# Altium PCB GRIPPER2009.PcbDoc (part 4 of 4)
Units mm, origin at the board's own origin, x right, y up, seen from the top; angles counter-clockwise.
Board outline 100.25 x 80.25 mm, 4 copper layers (Top Layer, Mid-Layer 1, Mid-Layer 2, Bottom Layer); 370 components, 241 nets, 1110 pads, 418 vias.
Unrouted connection lines stored in the file: 10.
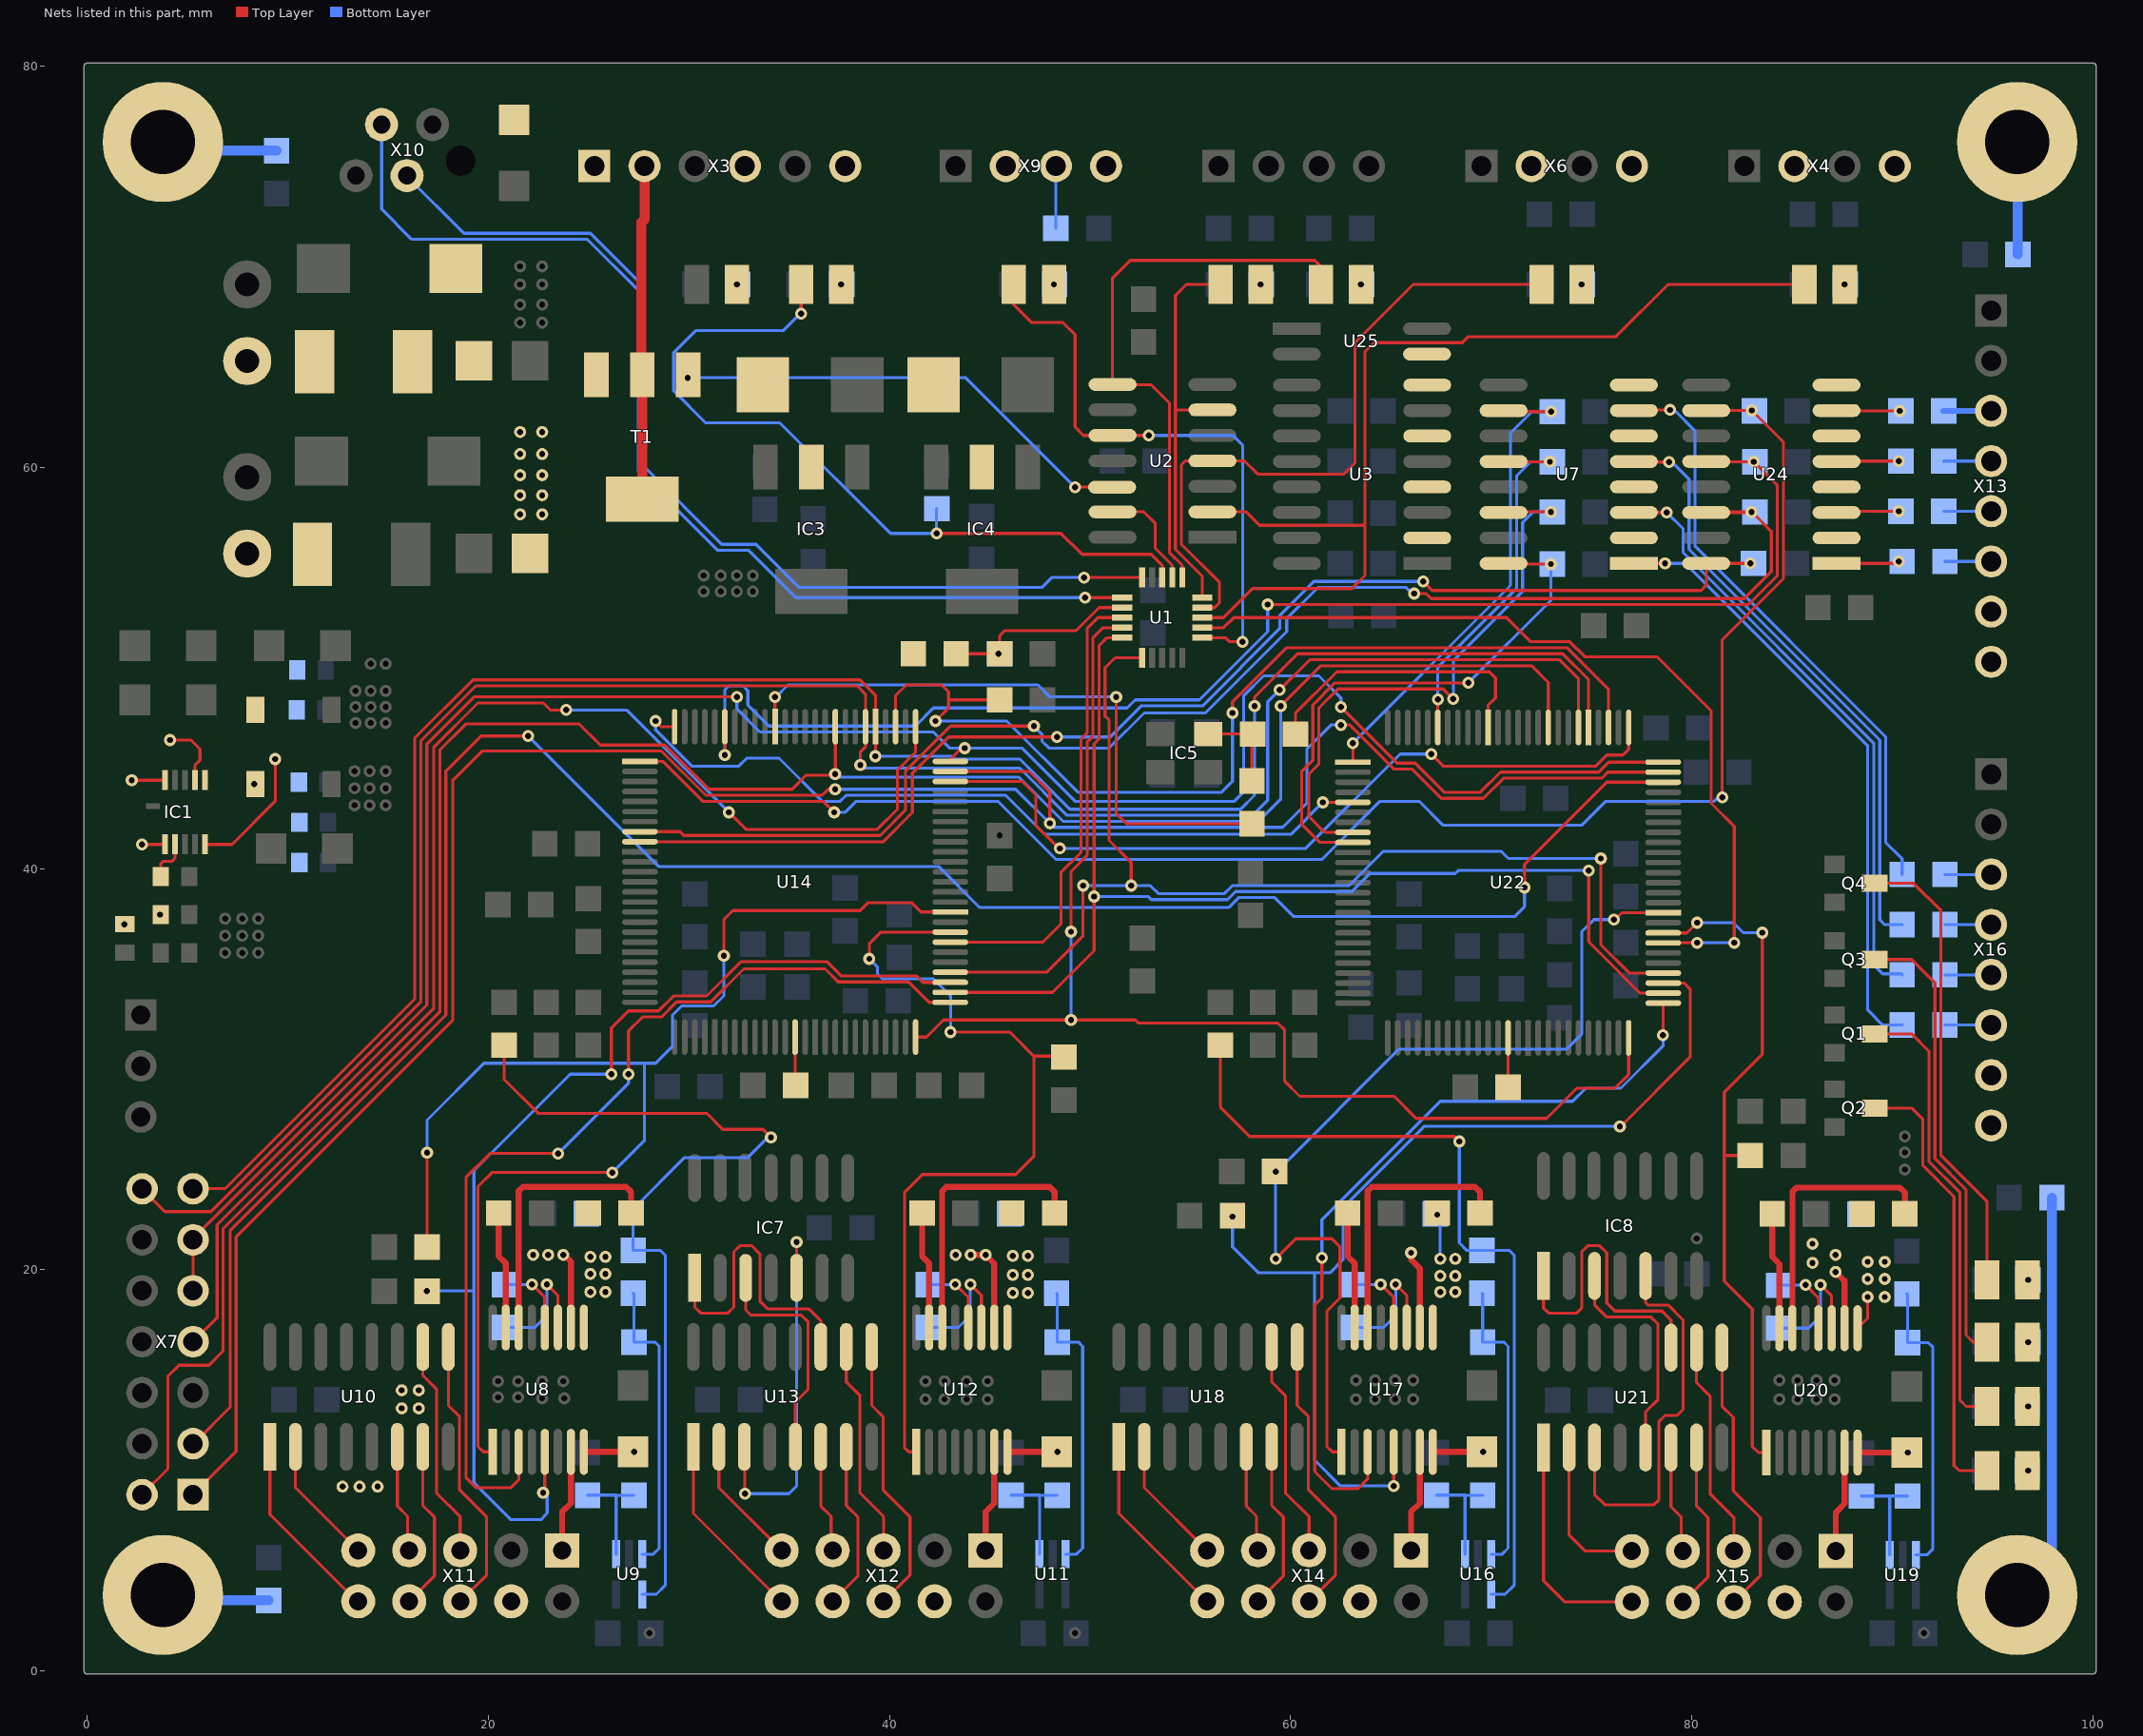
[diagram p6: the nets of this part, all layers, seen from the top]

## Via types
v1: diameter 0.6, hole 0.3, Top Layer to Bottom Layer, 418 vias

## Nets (pads, with @x,y where several pads share a name; then routed paths per layer and width w, separated by ;. In a path a pad name is that pad's centre, name@x,y a point inside that pad or via, vN(x,y) a via of type N, cw(c..) or ccw(c..) an arc to the next point about the centre after c; other vN are vias at no path point) (continued)
N15757211: D3.1 R12.1 U1.13 | length 40.3
  Top Layer w0.15: v1(35.6,67.65) D3.1@35.6,69.1 ; v1(42.35,56.7) 48.55,56.7 49.6,55.65 53.05,55.65 53.599,55.101 U1.13@53.599,54.496
  Bottom Layer w0.15: v1(35.6,67.65) 35.55,67.65 34.7,66.8 30.35,66.8 29.25,65.7 29.25,63.8 30.85,62.2 34.55,62.2 40.05,56.7 v1(42.35,56.7) 42.35,57.916 R12.1@42.367,57.933
N15772152: U1.18 U14.57 | length 23.1
  Top Layer w0.15: U14.57@43.036,36.33 47.65,36.33 48.55,37.229 48.55,39.8 49.55,40.8 49.55,46.45 49.85,46.75 49.85,51.95 50.398,52.498 U1.18@51.601,52.498
N15795123: U14.84 U22.84 X7.2 | length 115.8
  Top Layer w0.15: X7.2@2.76,8.8 4.05,10.09 4.05,14.7 4.6,15.25 6.1,15.25 6.8,15.95 6.8,22.05 17.6,32.85 17.6,45.9 18.9,47.2 24.55,47.2 25.6,46.15 28.8,46.15 31,43.95 35.15,43.95 35.85,44.65 37.306,44.65 U14.84@37.306,47.063 37.3,47.057 v1(37.3,44.7) ; v1(59.5,48.1) 61.5,50.1 72,50.1 72.833,49.267 U22.84@72.833,47.027
  Bottom Layer w0.15: v1(37.3,44.7) 37.4,44.7 37.55,44.55 46.45,44.55 48.65,42.35 58.4,42.35 59.5,43.45 v1(59.5,48.1)
N15795127: U14.75 U22.75 X7.9 X7.11 | length 106.9
  Top Layer w0.15: X7.9@5.3,18.96 X7.11@5.3,21.5 5.3,21.55 16.95,33.2 16.95,46.2 19.3,48.55 v1(32.4,48.55) ; U14.75@43.036,45.336 43,45.373 43,45.4 43.6,46 v1(43.75,46) ; v1(62.5,48.05) 65.3,45.25 66.2,45.25 67.65,43.8 69.45,43.8 70.45,44.8 75.35,44.8 75.85,45.3 U22.75@78.563,45.3
  Bottom Layer w0.15: v1(32.4,48.55) 32.4,47.95 33.55,46.8 42.2,46.8 43,46 v1(43.75,46) 46.6,46 49.25,43.35 57.2,43.35 57.65,43.8 57.65,48.6 58.65,49.6 61.4,49.6 62.5,48.5 v1(62.5,48.05)
N15795225: U14.74 U22.74 X7.1 ~FV25.FV | length 116.4
  Top Layer w0.15: X7.1@5.3,8.8 7.45,10.95 7.45,21.65 18.25,32.45 18.25,44.4 19.7,45.85 28.65,45.85 30.85,43.65 36.65,43.65 36.95,43.95 v1(37.3,43.95) ; U14.74@43.036,44.836 46.964,44.836 48,43.8 ~FV25.FV@48,42.25 ; v1(62.5,47.15) 62.95,47.15 65.15,44.95 66.05,44.95 67.5,43.5 69.6,43.5 70.6,44.5 75.5,44.5 75.799,44.799 U22.74@78.563,44.799
  Bottom Layer w0.15: v1(37.3,43.95) 46.3,43.95 ~FV25.FV@48,42.25 48.2,42.05 59.6,42.05 60.8,43.25 60.8,45.95 62,47.15 v1(62.5,47.15)
N15795229: U22.73 X7.3 | length 108.3
  Top Layer w0.15: X7.3@5.3,11.34 5.34,11.34 7.15,13.15 7.15,21.95 17.9,32.7 17.9,44.85 19.65,46.6 v1(22,46.6) ; v1(71.65,39.05) 71.65,40.2 75.75,44.3 76.848,44.3 ; U22.73@78.563,44.299 76.849,44.299 ; 76.848,44.3 76.849,44.299
  Bottom Layer w0.15: v1(22,46.6) 28.5,40.1 42.45,40.1 44.5,38.05 56.9,38.05 57.4,38.55 59.2,38.55 60.15,37.6 71.15,37.6 71.65,38.1 v1(71.65,39.05)
N15867067: R19.2 U14.90 | length 31.8
  Top Layer w0.15: v1(34.3,48.55) 34.3,47.067 U14.90@34.304,47.063 ; v1(51.3,48.55) 51.3,42.75 51.817,42.233 R19.2@58.067,42.233
  Bottom Layer w0.15: v1(34.3,48.55) 34.35,48.55 34.95,49.15 47.4,49.15 48,48.55 v1(51.3,48.55)
N15867073: R17.2 U22.90 | length 14.6
  Top Layer w0.15: R17.2@60.234,46.7 60.234,47.734 62.3,49.8 69.9,49.8 70.2,49.5 70.2,48.5 69.831,48.131 U22.90@69.831,47.027
N15869117: IC5.3 R17.1 R19.1 | length 4.5
  Top Layer w0.15: IC5.3@55.9,46.7 R17.1@58.1,46.7 58.067,46.667 R19.1@58.067,44.367
N15872763: U1.1 U14.54 U22.54 | length 65.5
  Top Layer w0.15: v1(49.65,39.15) 49.65,36.65 47.828,34.828 ; v1(52.05,39.15) 52.05,40.3 50.95,41.4 50.95,47.4 50.75,47.6 50.75,50 51.25,50.5 U1.1@52.6,50.5 ; v1(75.45,40.5) 75.45,36.2 76.858,34.792 U22.54@78.563,34.792 ; 47.828,34.828 U14.54@43.036,34.828 47.828,34.828
  Bottom Layer w0.15: v1(52.05,39.15) v1(49.65,39.15) 53,39.15 53.4,38.75 56.7,38.75 57.1,39.15 62.9,39.15 64.6,40.85 70.5,40.85 70.85,40.5 v1(75.45,40.5)
N15873803: U1.20 U14.52 U22.52 | length 61
  Top Layer w0.15: U14.52@43.036,33.828 48.128,33.828 50.2,35.9 ; v1(50.2,38.6) 50.2,35.9 ; U1.20@51.601,51.499 50.849,51.499 50.45,51.1 50.45,46.45 50.2,46.2 50.2,35.9 ; v1(74.85,39.9) 74.85,36.35 77.409,33.791 U22.52@78.563,33.791
  Bottom Layer w0.15: v1(50.2,38.6) 52.9,38.6 53.05,38.45 56.85,38.45 57.25,38.85 63.05,38.85 63.95,39.75 68.2,39.75 68.35,39.9 v1(74.85,39.9)
N15874402: U1.19 U14.50 U22.50 | length 69.6
  Top Layer w0.15: U14.50@41.309,31.6 41.85,31.6 42.7,32.45 ; v1(49.05,32.45) 42.7,32.45 ; v1(49.05,36.85) 49.05,39.85 49.85,40.65 49.85,46.3 50.15,46.6 50.15,51.5 50.649,51.999 U1.19@51.601,51.999 ; U22.50@76.836,31.563 76.836,29.736 76.15,29.05 74.25,29.05 72.75,27.55 66.25,27.55 65.15,28.65 60.45,28.65 59.7,29.4 59.7,31.95 59.35,32.3 52.4,32.3 52.25,32.45 42.7,32.45
  Bottom Layer w0.15: v1(49.05,32.45) v1(49.05,36.85)
N15875912: U1.7 U22.57 | length 43
  Top Layer w0.15: U1.7@55.597,51.999 56.649,51.999 57.175,52.5 70.75,52.5 71.95,51.3 73.9,51.3 74.65,50.55 78.249,50.55 80.95,47.85 80.95,43.25 82.1,42.1 v1(82.1,36.3) ; U22.57@78.563,36.293 78.571,36.3 v1(80.25,36.3)
  Bottom Layer w0.15: v1(80.25,36.3) v1(82.1,36.3)
N15878002: R16.1 U14.78 U22.78 | length 54.4
  Top Layer w0.15: U14.78@40.308,47.063 40.308,48.608 40.85,49.15 42.6,49.15 42.95,48.8 42.95,48.4 ; v1(42.3,47.35) 42.95,48 42.95,48.4 ; v1(57.1,47.75) 57.1,48.3 59.8,51 73.75,51 75.835,48.914 U22.78@75.835,47.027 ; 42.95,48.4 R16.1@45.5,48.4 42.95,48.4
  Bottom Layer w0.15: v1(42.3,47.35) 45.85,47.35 49.4,43.8 56.55,43.8 57.1,44.35 v1(57.1,47.75)
N15878863: U14.81 U22.81 X7.14 | length 104.5
  Top Layer w0.15: X7.14@2.76,24.04 3.9,22.9 6.2,22.9 16.65,33.35 16.65,46.35 19.4,49.1 38.4,49.1 38.807,48.693 U14.81@38.807,47.063 38.807,46.057 38.55,45.8 v1(38.55,45.15) ; v1(59.45,48.9) 60.95,50.4 73.4,50.4 74.334,49.466 U22.81@74.334,47.027
  Bottom Layer w0.15: v1(38.55,45.15) 38.7,45 46.5,45 48.85,42.65 58.1,42.65 58.85,43.4 58.85,48.3 v1(59.45,48.9)
N15879489: U14.80 U22.80 X7.13 | length 101.2
  Top Layer w0.15: X7.13@5.3,24.04 5.3,24.1 5.35,24.05 6.9,24.05 16.35,33.5 16.35,46.5 19.25,49.4 38.55,49.4 39.308,48.642 U14.80@39.308,47.063 v1(39.308,45.592) ; v1(58.2,48.1) 58.2,48.55 60.35,50.7 73.55,50.7 74.835,49.415 U22.80@74.835,47.027
  Bottom Layer w0.15: v1(39.308,45.592) 43.108,45.592 43.25,45.45 46.5,45.45 49,42.95 57.5,42.95 58.2,43.65 v1(58.2,48.1)
N15882073: U14.73 U22.76 | length 39.7
  Top Layer w0.15: U14.73@43.036,44.336 46.614,44.336 47.3,43.65 47.3,42.15 48.45,41 v1(48.5,41) ; v1(67,45.7) 67.6,45.1 75.2,45.1 75.75,45.65 76.55,45.65 76.836,45.936 U22.76@76.836,47.027
  Bottom Layer w0.15: v1(48.5,41) 60.75,41 65.45,45.7 v1(67,45.7)
N15882739: U14.76 X7.7 | length 66.1
  Top Layer w0.15: X7.7@5.3,16.42 6.5,17.62 6.5,22.25 17.3,33.05 17.3,46.05 19.5,48.25 22.75,48.25 23.1,47.9 v1(23.9,47.9) ; v1(32,42.8) 32.85,41.95 39.4,41.95 40.4,42.95 40.4,44.9 41.309,45.809 U14.76@41.309,47.063
  Bottom Layer w0.15: v1(23.9,47.9) 26.9,47.9 v1(32,42.8)
N15932011: IC1.5 R2.1 R3.1 | length 6.5
  Top Layer w0.15: IC1.5@5.9,41.2 7.25,41.2 9.4,43.35 v1(9.4,45.45)
N15932045: IC1.10 L5.1 | length 1.7
  Top Layer w0.15: v1(2.25,44.4) IC1.10@3.9,44.4 ; v1(8.35,44.2) L5.1@8.4,44.2
N15932053: C10.2 IC1.1 R6.1 R7.2 | length 1.2
  Top Layer w0.15: v1(2.75,41.2) IC1.1@3.9,41.2
N15932099: IC1.6 L3.1
N15932257: C9.1 IC1.7 R1.1 | length 3.5
  Top Layer w0.15: v1(1.878,37.222) C9.1@1.9,37.222 ; v1(4.15,46.4) 5.2,46.4 5.65,45.95 5.65,45.4 5.4,45.15 IC1.7@5.4,44.4 ; v1(3.65,37.7) R1.1@3.7,37.7 v1(3.65,37.7)
N15932803: IC1.2 R5.1 | length 2.2
  Top Layer w0.15: R5.1@3.7,39.6 3.7,40.25 3.8,40.35 4.25,40.35 4.4,40.5 IC1.2@4.4,41.2
N15972825: R28.2 X9.3 | length 3.1
  Bottom Layer w0.15: R28.2@48.3,71.9 X9.3@48.3,75
N15973694: R76.1 X16.3 | length 2.3
  Bottom Layer w0.15: R76.1@92.6,39.7 X16.3@94.9,39.7
N15973694_3838: R50.1 X13.3 | length 2.4
  Bottom Layer w0.3: R50.1@92.534,62.8 X13.3@94.9,62.8
N15974140: R71.1 X16.4 | length 2.3
  Bottom Layer w0.15: R71.1@92.6,37.2 X16.4@94.9,37.2
N15974140_3840: R52.1 X13.4 | length 2.4
  Bottom Layer w0.15: R52.1@92.534,60.3 X13.4@94.9,60.3
N15974588: R67.1 X16.5 | length 2.3
  Bottom Layer w0.15: R67.1@92.6,34.7 X16.5@94.9,34.7
N15974588_3842: R53.1 X13.5 | length 2.4
  Bottom Layer w0.15: R53.1@92.534,57.8 X13.5@94.9,57.8
N15975038: R72.1 X16.6 | length 2.3
  Bottom Layer w0.15: R72.1@92.6,32.2 X16.6@94.9,32.2
N15975038_3844: R54.1 X13.6 | length 2.3
  Bottom Layer w0.15: R54.1@92.6,55.3 X13.6@94.9,55.3
N15975490: R76.2 U7.7 | length 29.9
  Top Layer w0.15: U7.7@77.1,62.82 77.13,62.85 v1(78.9,62.85)
  Bottom Layer w0.15: v1(78.9,62.85) 79.1,62.85 80.15,61.8 80.15,56.05 89.65,46.55 89.65,41.3 90.466,40.484 R76.2@90.466,39.7
N15975490_3846: R50.2 U24.7 | length 3.2
  Top Layer w0.15: U24.7@87.2,62.82 87.22,62.8 v1(90.35,62.8)
  Bottom Layer w0.15: v1(90.35,62.8) R50.2@90.4,62.8
N15975944: R71.2 U7.5 | length 30.2
  Top Layer w0.15: U7.5@77.1,60.28 77.13,60.25 v1(78.85,60.25)
  Bottom Layer w0.15: v1(78.85,60.25) 79,60.25 79.85,59.4 79.85,55.9 89.35,46.4 89.35,37.45 89.6,37.2 R71.2@90.466,37.2
N15975944_3848: R52.2 U24.5 | length 3.2
  Top Layer w0.15: U24.5@87.2,60.28 87.22,60.3 v1(90.3,60.3)
  Bottom Layer w0.15: v1(90.3,60.3) R52.2@90.4,60.3
N15976400: R67.2 U7.3 | length 30.1
  Top Layer w0.15: U7.3@77.1,57.74 v1(78.74,57.74)
  Bottom Layer w0.15: v1(78.74,57.74) 79.55,56.93 79.55,55.75 89.05,46.25 89.05,35.2 89.5,34.75 90.416,34.75 R67.2@90.466,34.7
N15976400_3850: R53.2 U24.3 | length 3.2
  Top Layer w0.15: U24.3@87.2,57.74 87.26,57.8 v1(90.3,57.8)
  Bottom Layer w0.15: v1(90.3,57.8) R53.2@90.4,57.8
N15976858: R72.2 U7.1 | length 30.6
  Top Layer w0.15: U7.1@77.1,55.2 v1(78.65,55.2)
  Bottom Layer w0.15: v1(78.65,55.2) 79.65,55.2 88.75,46.1 88.75,32.95 89.5,32.2 R72.2@90.466,32.2
N15976858_3852: R54.2 U24.1 | length 3.3
  Top Layer w0.15: U24.1@87.2,55.2 90.25,55.2 90.3,55.25 v1(90.3,55.3)
  Bottom Layer w0.15: v1(90.3,55.3) R54.2@90.466,55.3
N15982543: D8.1 U1.6 U2.10 | length 29.9
  Top Layer w0.15: D8.1@46.2,69.1 46.2,68.1 47.1,67.2 48.65,67.2 49.25,66.6 49.25,62 49.67,61.58 U2.10@51.122,61.58 v1(52.93,61.58) ; U1.6@55.597,51.499 55.598,51.5 56.75,51.5 56.95,51.3 v1(57.6,51.3)
  Bottom Layer w0.15: v1(52.93,61.58) 57.12,61.58 57.6,61.1 v1(57.6,51.3)
N15982913: D7.1 U1.11 U2.8 | length 29.2
  Top Layer w0.15: U1.11@54.598,54.496 54.598,55.102 53.95,55.75 53.95,63.2 53.05,64.1 51.142,64.1 U2.8@51.122,64.12 51.122,69.422 52,70.3 61.2,70.3 61.5,70 D7.1@61.5,69.1
N15983284: D6.1 U1.10 U2.6 | length 21.8
  Top Layer w0.15: U1.10@55.597,53.497 55.597,54.553 54.25,55.9 54.25,62.85 ; D6.1@56.5,69.1 54.8,69.1 54.25,68.55 54.25,62.85 ; 54.25,62.85 U2.6@56.1,62.85 54.25,62.85
N15983658: D5.1 U1.9 U2.4 | length 34.3
  Top Layer w0.15: U1.9@55.597,52.998 56.198,52.998 56.45,53.25 56.45,54.25 54.55,56.15 54.55,60.1 54.76,60.31 U2.4@56.1,60.31 57.69,60.31 58.35,59.65 62.65,59.65 63.2,60.2 63.2,66.2 66.1,69.1 D5.1@72.5,69.1
N15983893: R74.2 U7.10 U22.1 | length 24.6
  Top Layer w0.15: U22.1@63.1,45.3 v1(63.1,46.25) ; U7.10@70.606,62.82 70.659,62.767 v1(72.983,62.767)
  Bottom Layer w0.15: v1(63.1,46.25) 70.95,54.1 70.95,61.7 72.017,62.767 R74.2@73.033,62.767 v1(72.983,62.767)
N15983893_3880: R46.2 U14.1 U24.10 | length 82.3
  Top Layer w0.15: U14.1@27.573,45.336 28.714,45.336 30.7,43.35 36.7,43.35 v1(37.25,42.8) ; U24.10@80.706,62.82 v1(82.98,62.82) 84.55,61.25 84.55,54.45 81.5,51.4 v1(81.5,43.55)
  Bottom Layer w0.15: v1(37.25,42.8) 37.8,42.8 38.35,43.35 45.4,43.35 48.3,40.45 61.55,40.45 64.45,43.35 66.4,43.35 67.6,42.15 74.5,42.15 75.7,43.35 81.1,43.35 81.3,43.55 v1(81.5,43.55) ; v1(82.98,62.82) 83,62.8 R46.2@83.1,62.8
N15984374: R69.2 U7.12 U22.95 | length 18.7
  Top Layer w0.15: U22.95@67.329,47.027 v1(67.329,48.421) ; U7.12@70.606,60.28 70.619,60.267 v1(72.917,60.267)
  Bottom Layer w0.15: v1(67.329,48.421) 67.329,50.029 71.25,53.95 71.25,59.55 71.967,60.267 R69.2@73.033,60.267 v1(72.917,60.267)
N15984374_3882: R47.2 U14.95 U24.12 | length 70.9
  Top Layer w0.15: v1(31.802,45.65) U14.95@31.802,47.063 ; v1(58.85,53.15) 82.8,53.15 84.25,54.6 84.25,59.084 v1(83.067,60.267) U24.12@80.719,60.267 ; U24.12@80.719,60.267 U24.12@80.706,60.28 U24.12@80.719,60.267
  Bottom Layer w0.15: v1(31.802,45.65) 31.802,48.902 32,49.1 32.7,49.1 32.95,48.85 32.95,48.15 34,47.1 41.3,47.1 42.2,48 51.85,48 52.25,48.4 55.45,48.4 58.85,51.8 v1(58.85,53.15) ; v1(83.067,60.267) R47.2@83.133,60.267
N15984858: R79.2 U7.14 U22.8 | length 29.8
  Top Layer w0.15: U22.8@63.1,41.797 61.703,41.797 60.9,42.6 60.9,44.7 61.4,45.2 61.4,48 62.35,48.95 67.6,48.95 v1(68.1,48.45) ; U7.14@70.606,57.74 70.633,57.767 v1(72.967,57.767)
  Bottom Layer w0.15: v1(68.1,48.45) 68.1,50.35 71.55,53.8 71.55,57.25 72.067,57.767 R79.2@73.033,57.767 v1(72.967,57.767)
N15984858_3884: R48.2 U14.8 U24.14 | length 73.1
  Top Layer w0.15: U14.8@27.573,41.834 29.566,41.834 29.75,41.65 39.55,41.65 40.8,42.9 40.8,44.85 43.05,47.1 v1(47.2,47.1) ; v1(66.15,53.7) 66.75,53.7 67,53.45 82.6,53.45 83.95,54.8 83.95,56.8 83.01,57.74 U24.14@80.706,57.74 80.733,57.767 v1(82.967,57.767)
  Bottom Layer w0.15: v1(47.2,47.1) 47.6,46.7 47.6,46.35 47.95,46 50.95,46 52.7,47.75 55.75,47.75 59.8,51.8 59.8,52.45 61.35,54 65.75,54 66.05,53.7 v1(66.15,53.7) ; v1(82.967,57.767) R48.2@83.133,57.767
N15985345: R73.2 U7.16 U22.9 | length 27.4
  Top Layer w0.15: U22.9@63.1,41.297 61.453,41.297 60.55,42.2 60.55,44.85 61.1,45.4 61.1,48.15 62.2,49.25 v1(68.85,49.25) ; U7.16@70.606,55.2 70.639,55.167 v1(72.967,55.167)
  Bottom Layer w0.15: v1(68.85,49.25) 72.967,53.367 v1(72.967,55.167) ; v1(72.967,55.167) R73.2@73.033,55.167 v1(72.967,55.167)
N15985345_3886: R49.2 U14.9 U24.16 | length 63.8
  Top Layer w0.15: U14.9@27.573,41.333 39.7,41.333 41.15,42.8 41.15,44.75 42.95,46.55 v1(48.35,46.55) ; v1(66.6,54.3) 67.05,53.85 80.45,53.85 80.706,54.106 U24.16@80.706,55.2 80.767,55.139 80.827,55.2 v1(82.9,55.2)
  Bottom Layer w0.15: v1(48.35,46.55) 51,46.55 52.55,48.1 55.6,48.1 59.45,51.95 59.45,52.6 61.15,54.3 v1(66.6,54.3) ; v1(82.9,55.2) R49.2@83.066,55.2
N16007951: U14.100 U22.5 | length 39.7
  Top Layer w0.15: v1(28.35,47.35) 28.35,47.327 28.613,47.063 U14.100@29.3,47.063 ; v1(61.602,43.298) U22.5@63.1,43.298
  Bottom Layer w0.15: v1(28.35,47.35) 28.35,46.9 30.15,45.1 32.5,45.1 32.9,45.5 34.5,45.5 36.65,43.35 37.55,43.35 37.85,43.65 45.8,43.65 47.75,41.7 60.004,41.7 v1(61.602,43.298)
N16065088: T1.2 T1.4 X3.2 | length 16.7
  Top Layer w0.15: T1.2@27.65,64.634 T1.2@27.686,64.598
  Top Layer w0.5: T1.2@27.65,64.634 27.65,72.2 27.8,72.35 X3.2@27.8,75 ; T1.4@27.686,58.4 T1.2@27.686,64.598
N16067588: T1.1 U2.12 | length 23.6
  Top Layer w0.15: v1(29.95,64.45) T1.1@29.972,64.598 ; v1(49.25,59) U2.12@51.1,59
  Bottom Layer w0.15: v1(29.95,64.45) 43.8,64.45 v1@49.25,59
N16082815: F1.1 X1.2
N16083562: F2.1 X2.2 | length 0.1
  Top Layer w0.15: X2.2@8,65.29 X2.2@8.045,65.245
N16083671: C3.1 F2.2 L2.1
N16099925: R63.1 R64.2 U19.3 | length 14.8
  Bottom Layer w0.15: R63.1@90.7,18.8 90.733,18.767 R64.2@90.733,16.367 91.783,16.367 92,16.15 92,6.1 91.7,5.8 U19.3@91.149,5.8
N16099925_4383: R40.1 R41.2 U11.3 | length 14.8
  Bottom Layer w0.15: R40.1@48.333,18.833 48.366,18.8 R41.2@48.366,16.4 49.416,16.4 49.633,16.183 49.633,6.133 49.333,5.833 U11.3@48.782,5.833
N16099925_4495: R58.1 R59.2 U16.3 | length 14.8
  Bottom Layer w0.15: R58.1@69.533,18.833 69.566,18.8 R59.2@69.566,16.4 70.616,16.4 70.833,16.183 70.833,6.133 70.533,5.833 U16.3@69.982,5.833
N16099925_4618: R34.1 R37.2 U9.3 | length 14.8
  Bottom Layer w0.15: R34.1@27.233,18.833 27.266,18.8 R37.2@27.266,16.4 28.316,16.4 28.533,16.183 28.533,6.133 28.233,5.833 U9.3@27.682,5.833
N16100227: R62.2 R65.2 U19.1 | length 6.7
  Bottom Layer w0.15: U19.1@89.849,5.8 89.849,8.749 88.449,8.749 R65.2@88.433,8.733 R62.2@90.733,8.733
N16100227_4403: R39.2 R42.2 U11.1 | length 6.7
  Bottom Layer w0.15: U11.1@47.483,5.833 47.483,8.783 46.083,8.783 R42.2@46.066,8.766 R39.2@48.366,8.766
N16100227_4512: R57.2 R60.2 U16.1 | length 6.7
  Bottom Layer w0.15: U16.1@68.683,5.833 68.683,8.783 67.283,8.783 R60.2@67.266,8.766 R57.2@69.566,8.766
N16100227_4635: R35.2 R38.2 U9.1 | length 6.7
  Bottom Layer w0.15: U9.1@26.383,5.833 26.383,8.783 24.983,8.783 R38.2@24.966,8.766 R35.2@27.266,8.766
N16100323: R62.1 R66.2 U20.8 | length 2.5
  Top Layer w0.15: R66.2@90.7,10.898 90.748,10.898 v1(90.75,10.9)
  Top Layer w0.3: U20.8@88.249,10.9 90.698,10.9 R66.2@90.7,10.898
  Bottom Layer w0.15: R62.1@90.733,10.867 90.75,10.884 v1(90.75,10.9)
N16100323_4401: R39.1 R43.2 U12.8 | length 2.5
  Top Layer w0.15: R43.2@48.333,10.931 48.381,10.931 v1(48.383,10.933)
  Top Layer w0.3: U12.8@45.882,10.933 48.331,10.933 R43.2@48.333,10.931
  Bottom Layer w0.15: R39.1@48.366,10.9 48.383,10.917 v1(48.383,10.933)
N16100323_4510: R57.1 R61.2 U17.8 | length 2.5
  Top Layer w0.15: R61.2@69.533,10.931 69.581,10.931 v1(69.583,10.933)
  Top Layer w0.3: U17.8@67.082,10.933 69.531,10.933 R61.2@69.533,10.931
  Bottom Layer w0.15: R57.1@69.566,10.9 69.583,10.917 v1(69.583,10.933)
N16100323_4633: R35.1 R36.2 U8.8 | length 2.5
  Top Layer w0.15: R36.2@27.233,10.931 27.281,10.931 v1(27.283,10.933)
  Top Layer w0.3: U8.8@24.782,10.933 27.231,10.933 R36.2@27.233,10.931
  Bottom Layer w0.15: R35.1@27.266,10.9 27.283,10.917 v1(27.283,10.933)
N16100371: C52.2 U20.14 | length 13.6
  Top Layer w0.3: U20.14@85,17.094 85,23.9 85.2,24.1 90.35,24.1 90.6,23.85 C52.2@90.6,22.8
N16100371_4400: C26.2 U12.14 | length 13.6
  Top Layer w0.3: U12.14@42.633,17.127 42.633,23.933 42.833,24.133 47.983,24.133 48.233,23.883 C26.2@48.233,22.833
N16100371_4509: C46.2 U17.14 | length 13.6
  Top Layer w0.3: U17.14@63.833,17.127 63.833,23.933 64.033,24.133 69.183,24.133 69.433,23.883 C46.2@69.433,22.833
N16100371_4632: C15.2 U8.14 | length 13.6
  Top Layer w0.3: U8.14@21.533,17.127 21.533,23.933 21.733,24.133 26.883,24.133 27.133,23.883 C15.2@27.133,22.833
N16100395: U20.7 X15.1 | length 5.1
  Top Layer w0.3: X15.1@87.16,5.99 87.16,7.91 87.599,8.349 U20.7@87.599,10.9
N16100395_4390: U12.7 X12.1 | length 5.1
  Top Layer w0.3: X12.1@44.793,6.023 44.793,7.943 45.232,8.382 U12.7@45.232,10.933
N16100395_4500: U17.7 X14.1 | length 5.1
  Top Layer w0.3: X14.1@65.993,6.023 65.993,7.943 66.432,8.382 U17.7@66.432,10.933
N16100395_4623: U8.7 X11.1 | length 5.1
  Top Layer w0.3: X11.1@23.693,6.023 23.693,7.943 24.132,8.382 U8.7@24.132,10.933
N16100427: U20.10 X15.4 ~FV13.FV ~FV14.FV ~FV15.FV ~FV16.FV | length 3
  Top Layer w0.3: ~FV13.FV@87.15,19.9 87.599,19.451 U20.10@87.599,17.094
N16100427_4391: U12.10 X12.4 ~FV98.FV ~FV99.FV ~FV100.FV | length 4.6
  Top Layer w0.3: ~FV99.FV@44.05,20.75 ~FV98.FV@44.8,20.75 45.232,20.318 U12.10@45.232,17.127
N16100427_4501: U17.10 X14.4 | length 3.9
  Top Layer w0.3: v1(66,20.85) 66,20.5 66.432,20.068 U17.10@66.432,17.127
N16100427_4624: U8.10 X11.4 ~FV101.FV ~FV102.FV ~FV103.FV | length 3.9
  Top Layer w0.3: U8.10@24.132,17.127 24.132,20.418 ~FV101.FV@23.8,20.75 ; ~FV101.FV@23.8,20.75 ~FV101.FV@23.75,20.75 ~FV101.FV@23.8,20.75
N16100435: C49.1 U20.15 | length 5.9
  Top Layer w0.3: C49.1@84,22.8 84,20.65 84.35,20.3 U20.15@84.35,17.094
N16100435_4397: C23.1 U12.15 | length 5.9
  Top Layer w0.3: C23.1@41.633,22.833 41.633,20.683 41.983,20.333 U12.15@41.983,17.127
N16100435_4507: C43.1 U17.15 | length 5.9
  Top Layer w0.3: C43.1@62.833,22.833 62.833,20.683 63.183,20.333 U17.15@63.183,17.127
N16100435_4630: C18.1 U8.15 | length 5.9
  Top Layer w0.3: C18.1@20.533,22.833 20.533,20.683 20.883,20.333 U8.15@20.883,17.127
N16100487: C51.2 U20.12 | length 5.2
  Top Layer w0.15: v1(85.65,19.25) 86.299,18.601 U20.12@86.299,17.094
  Bottom Layer w0.15: v1@85.65,19.234 C51.2@84.3,19.234 85.666,19.234 v1(85.65,19.25)
N16100487_4399: C25.2 U12.12 | length 5.2
  Top Layer w0.15: v1(43.283,19.283) 43.932,18.634 U12.12@43.932,17.127
  Bottom Layer w0.15: v1@43.283,19.267 C25.2@41.933,19.267 43.3,19.267 v1(43.283,19.283)
N16100487_4508: C45.2 U17.12 | length 5.2
  Top Layer w0.15: v1(64.483,19.283) 65.132,18.634 U17.12@65.132,17.127
  Bottom Layer w0.15: v1@64.483,19.267 C45.2@63.133,19.267 64.5,19.267 v1(64.483,19.283)
N16100487_4631: C17.2 U8.12 | length 5.2
  Top Layer w0.15: v1(22.183,19.283) 22.832,18.634 U8.12@22.832,17.127
  Bottom Layer w0.15: v1@22.183,19.267 C17.2@20.833,19.267 22.2,19.267 v1(22.183,19.283)
N16100491: C51.1 U20.11 | length 6.3
  Top Layer w0.15: v1(86.4,19.25) 86.95,18.7 U20.11@86.949,17.094 U20.11@86.949,17.094
  Bottom Layer w0.15: C51.1@84.3,17.1 85.8,17.1 86.4,17.7 v1(86.4,19.25)
N16100491_4388: C25.1 U12.11 | length 6.3
  Top Layer w0.15: v1(44.033,19.283) 44.583,18.733 U12.11@44.582,17.127 ; U12.11@44.582,17.127 U12.11@44.582,17.127
  Bottom Layer w0.15: C25.1@41.933,17.133 43.433,17.133 44.033,17.733 v1(44.033,19.283)
N16100491_4498: C45.1 U17.11 | length 6.3
  Top Layer w0.15: v1(65.233,19.283) 65.783,18.733 U17.11@65.783,17.128 ; U17.11@65.782,17.127 U17.11@65.783,17.128
  Bottom Layer w0.15: C45.1@63.133,17.133 64.633,17.133 65.233,17.733 v1(65.233,19.283)
N16100491_4621: C17.1 U8.11 | length 6.3
  Top Layer w0.15: v1(22.933,19.283) 23.483,18.733 U8.11@23.482,17.127 U8.11@23.482,17.127
  Bottom Layer w0.15: C17.1@20.833,17.133 22.333,17.133 22.933,17.733 v1(22.933,19.283)
N16101266: U1.12 U2.13 | length 5.4
  Top Layer w0.15: U2.13@51.122,57.77 52.68,57.77 53.25,57.2 53.25,55.95 54.099,55.101 U1.12@54.099,54.496
N16107374: U21.2 X15.9 | length 7.8
  Top Layer w0.15: U21.2@73.87,11.15 73.87,6.794 74.674,5.99 X15.9@77,5.99
N16107374_4881: U18.2 X14.9 | length 6.5
  Top Layer w0.15: U18.2@52.703,11.183 52.703,9.147 55.827,6.023 X14.9@55.833,6.023
N16107374_4882: U13.2 X12.9 | length 6.5
  Top Layer w0.15: U13.2@31.503,11.183 31.503,9.147 34.627,6.023 X12.9@34.633,6.023
N16107374_4883: U10.2 X11.9 | length 6.5
  Top Layer w0.15: U10.2@10.403,11.183 10.403,9.147 13.527,6.023 X11.9@13.533,6.023
N16107638: U21.1 X15.10 | length 11.5
  Top Layer w0.15: U21.1@72.6,11.15 72.6,4.508 73.658,3.45 X15.10@77,3.45
N16107638_4885: U18.1 X14.10 | length 9.5
  Top Layer w0.15: U18.1@51.433,11.183 51.433,7.867 55.817,3.483 X14.10@55.833,3.483
N16107638_4886: U13.1 X12.10 | length 9.5
  Top Layer w0.15: U13.1@30.233,11.183 30.233,7.867 34.617,3.483 X12.10@34.633,3.483
N16107638_4887: U10.1 X11.10 | length 9.6
  Top Layer w0.15: U10.1@9.133,11.183 9.133,7.817 13.467,3.483 X11.10@13.533,3.483
N16107815: U21.6 X15.7 | length 5.5
  Top Layer w0.15: U21.6@78.95,11.15 78.95,8.2 79.46,7.69 79.46,5.99 X15.7@79.54,5.99
N16107815_4889: U18.6 X14.7 | length 5.5
  Top Layer w0.15: U18.6@57.783,11.183 57.783,8.233 58.293,7.723 58.293,6.023 X14.7@58.373,6.023
N16107815_4890: U13.6 X12.7 | length 5.5
  Top Layer w0.15: U13.6@36.583,11.183 36.583,8.233 37.093,7.723 37.093,6.023 X12.7@37.173,6.023
N16107815_4891: U10.6 X11.7 | length 5.5
  Top Layer w0.15: U10.6@15.483,11.183 15.483,8.233 15.993,7.723 15.993,6.023 X11.7@16.073,6.023
N16108293: U21.7 X15.8 | length 8.5
  Top Layer w0.15: X15.8@79.54,3.45 80.8,4.71 80.8,7.65 80.22,8.23 U21.7@80.22,11.15
N16108293_4893: U18.7 X14.8 | length 8.5
  Top Layer w0.15: X14.8@58.373,3.483 59.633,4.743 59.633,7.683 59.053,8.263 U18.7@59.053,11.183
N16108293_4894: U13.7 X12.8 | length 8.5
  Top Layer w0.15: X12.8@37.173,3.483 38.433,4.743 38.433,7.683 37.853,8.263 U13.7@37.853,11.183
N16108293_4895: U10.7 X11.8 | length 8.5
  Top Layer w0.15: X11.8@16.073,3.483 17.333,4.743 17.333,7.683 16.753,8.263 U10.7@16.753,11.183
N16108485: U21.10 X15.5 | length 10.9
  Top Layer w0.15: U21.10@80.22,16.128 80.22,14.38 80.9,13.7 80.9,8.85 82.08,7.67 X15.5@82.08,5.99
N16108485_4897: U18.10 X14.5 | length 10.9
  Top Layer w0.15: U18.10@59.053,16.162 59.053,14.413 59.733,13.733 59.733,8.883 60.913,7.703 X14.5@60.913,6.023
N16108485_4898: U13.10 X12.5 | length 10.9
  Top Layer w0.15: U13.10@37.853,16.162 37.853,14.413 38.533,13.733 38.533,8.883 39.713,7.703 X12.5@39.713,6.023
N16108485_4899: U10.10 X11.5 | length 10.9
  Top Layer w0.15: U10.10@16.753,16.162 16.753,14.747 17.433,14.067 17.433,8.883 18.613,7.703 X11.5@18.613,6.023
N16108683: U21.9 X15.6 | length 14
  Top Layer w0.15: U21.9@81.49,16.128 81.49,13.21 82.05,12.65 82.05,9 83.4,7.65 83.4,4.77 X15.6@82.08,3.45
N16108683_4901: U18.9 X14.6 | length 14
  Top Layer w0.15: U18.9@60.323,16.162 60.323,13.243 60.883,12.683 60.883,9.033 62.233,7.683 62.233,4.803 X14.6@60.913,3.483
N16108683_4902: U13.9 X12.6 | length 14
  Top Layer w0.15: U13.9@39.123,16.162 39.123,13.243 39.683,12.683 39.683,9.033 41.033,7.683 41.033,4.803 X12.6@39.713,3.483
N16108683_4903: U10.9 X11.6 | length 14
  Top Layer w0.15: U10.9@18.023,16.162 18.023,13.243 18.583,12.683 18.583,9.033 19.933,7.683 19.933,4.803 X11.6@18.613,3.483
N16115526: IC8.1 U21.11 | length 15.5
  Top Layer w0.15: IC8.1@72.6,19.7 72.6,18.1 72.85,17.85 74.25,17.85 74.5,18.1 74.5,20.9 74.8,21.2 75.4,21.2 75.75,20.85 75.75,18.35 76.15,17.95 78.5,17.95 78.95,17.5 U21.11@78.95,16.128
N16115526_4468: IC7.1 U13.11 | length 15.1
  Top Layer w0.15: IC7.1@30.3,19.6 30.3,18.15 30.6,17.85 31.95,17.85 32.25,18.15 32.25,20.9 32.55,21.2 33.15,21.2 33.55,20.8 33.55,18.45 33.95,18.05 36,18.05 36.583,17.467 U13.11@36.583,16.162
N16115875: IC8.3 U21.5 | length 11.4
  Top Layer w0.15: IC8.3@75.14,19.7 75.14,18.26 75.75,17.65 77.95,17.65 78.3,17.3 78.3,13.55 77.68,12.93 U21.5@77.68,11.15
N16115875_4470: IC7.3 U13.5 | length 11.4
  Top Layer w0.15: IC7.3@32.84,19.6 32.84,18.01 33.1,17.75 35.6,17.75 35.95,17.4 35.95,14.05 35.313,13.413 U13.5@35.313,11.183
N16116226: IC8.5 U21.3 | length 19.2
  Top Layer w0.15: U21.3@75.14,11.15 75.14,8.81 75.65,8.3 78.1,8.3 78.35,8.55 78.35,12.45 78.65,12.75 79.25,12.75 79.55,13.05 79.55,17.5 78.8,18.25 77.8,18.25 77.68,18.37 IC8.5@77.68,19.7
N16116226_4472: IC7.5 U13.3 | length 19
  Top Layer w0.15: U13.3@32.773,11.183 32.8,11.156 v1(32.8,8.85) ; IC7.5@35.38,19.6 v1(35.38,21.38)
  Bottom Layer w0.15: v1(32.8,8.85) 35,8.85 35.38,9.23 v1(35.38,21.38)
N16123985: R58.2 R68.1 U16.4 | length 41.5
  Top Layer w0.15: R68.1@56.5,31.2 56.5,28.1 57.95,26.65 68.15,26.65 v1(68.4,26.4)
  Bottom Layer w0.15: v1(68.4,26.4) 68.4,21.35 68.783,20.967 R58.2@69.533,20.967 70.9,20.967 71.133,20.733 71.133,4.283 70.685,3.835 U16.4@69.982,3.835
N16123985_4670: R34.2 R45.1 U9.4 | length 46.1
  Top Layer w0.15: R45.1@20.8,31.2 20.8,29.5 22.5,27.8 30.9,27.8 31.7,27 33.7,27 v1(34.1,26.6)
  Bottom Layer w0.15: U9.4@27.682,3.835 28.385,3.835 28.833,4.283 28.833,20.733 28.6,20.967 R34.2@27.233,20.967 27.233,23.033 29.8,25.6 32.95,25.6 33.95,26.6 v1(34.1,26.6)
N16132305: U17.3 U22.51 | length 40
  Top Layer w0.15: v1(61.55,20.6) 61.55,18.6 61.2,18.25 61.2,9.95 62.05,9.1 63.35,9.1 63.834,9.584 U17.3@63.834,10.933 ; v1(78.55,31.7) 78.55,33.277 U22.51@78.563,33.29
  Bottom Layer w0.15: v1(61.55,20.6) 61.55,22.5 67.45,28.4 74.05,28.4 74.7,29.05 76.45,29.05 78.55,31.15 v1(78.55,31.7)
N16132305_4674: U8.3 U14.51 | length 50
  Top Layer w0.15: U8.3@21.534,10.933 21.534,9.534 21.15,9.15 19.4,9.15 18.9,9.65 18.9,24.6 20.1,25.8 v1(23.5,25.8) ; v1(27,29.75) 27,31.9 27.7,32.6 28.65,32.6 29.4,33.35 31.1,33.35 32.75,35 36.8,35 37.45,34.35 40.95,34.35 41.973,33.327 U14.51@43.036,33.327
  Bottom Layer w0.15: v1(23.5,25.8) 27,29.3 v1(27,29.75)
N16133214: R84.1 U17.5 U22.53 | length 54.1
  Top Layer w0.15: v1(65.132,9.234) U17.5@65.132,10.933 ; v1(76.4,27.15) 76.45,27.15 79.9,30.6 79.9,34 79.609,34.291 U22.53@78.563,34.291 ; v1(57.1,22.65) R84.1@57.1,22.7 v1(57.1,22.65)
  Bottom Layer w0.15: v1(57.1,22.65) 57.1,21.15 58.4,19.85 ; v1(65.132,9.234) 62.482,9.234 61.183,10.533 61.183,19.833 61.2,19.85 58.4,19.85 ; v1(76.4,27.15) 66.65,27.15 62.6,23.1 62.6,20.5 61.95,19.85 58.4,19.85
N16133214_4676: R80.1 U8.5 U14.53 | length 55.5
  Top Layer w0.15: v1(16.95,18.95) R80.1@16.967,18.933 ; v1(22.75,8.9) 22.832,8.982 U8.5@22.832,10.933 ; v1(26.15,29.75) 26.15,32.05 27,32.9 28.5,32.9 29.25,33.65 30.9,33.65 32.6,35.35 36.9,35.35 37.6,34.65 41.35,34.65 41.672,34.328 U14.53@43.036,34.328
  Bottom Layer w0.15: v1(16.95,18.95) 19.3,18.95 ; v1(22.75,8.9) 22.95,8.7 22.95,7.887 22.638,7.55 21.147,7.55 19.3,9.4 19.3,18.95 ; v1(26.15,29.75) 24.1,29.75 19.3,24.95 19.3,18.95
N16136613: R87.1 U20.1 U22.58 | length 34.4
  Top Layer w0.15: U22.58@78.563,36.793 79.743,36.793 v1(80.25,37.3) ; R87.1@82.9,25.7 81.6,25.7 ; v1(83.5,36.8) 83.5,30.75 81.6,28.85 81.6,25.7 ; U20.1@83.7,10.9 83.3,10.9 83,11.2 83,18.05 81.6,19.45 81.6,25.7
  Bottom Layer w0.15: v1(80.25,37.3) 82.05,37.3 82.55,36.8 v1(83.5,36.8)
N16136613_4682: R83.1 U12.1 U14.58 | length 43.7
  Top Layer w0.15: v1(39,35.5) 39,36.25 39.58,36.83 U14.58@43.036,36.83 ; U12.1@41.333,10.933 40.967,10.933 40.75,11.15 40.75,23.85 41.65,24.75 46.3,24.75 47.2,25.65 47.2,30.65 ; v1(43.05,31.85) 46,31.85 47.2,30.65 ; R83.1@48.7,30.6 48.75,30.65 47.2,30.65
  Bottom Layer w0.15: v1(39,35.5) 39.4,35.1 39.4,34.75 39.65,34.5 42.2,34.5 43.05,33.65 v1(43.05,31.85)
N16137258: R85.1 U17.1 U22.60 | length 46.9
  Top Layer w0.15: R85.1@59.2,24.9 v1(59.25,24.9) ; v1(59.25,20.55) 60.25,21.55 62.05,21.55 62.45,21.15 62.45,18.6 61.8,17.95 61.8,11.2 62.067,10.933 U17.1@62.533,10.933 ; v1(76.1,37.45) 76.15,37.45 76.494,37.794 U22.60@78.563,37.794
  Bottom Layer w0.15: v1(59.25,20.55) v1(59.25,24.9) 59.3,24.9 65.4,31 73.75,31 74.5,31.75 74.5,36.85 75.1,37.45 v1(76.1,37.45)
N16137258_4684: R81.1 U8.1 U14.60 | length 75.1
  Top Layer w0.15: R81.1@16.967,21.133 v1(16.967,25.833) ; U8.1@20.233,10.933 19.767,10.933 19.5,11.2 19.5,24.15 20.2,24.85 v1(26.2,24.85) ; v1(31.75,35.65) 31.75,37.45 32.2,37.9 38.55,37.9 38.95,38.3 41.1,38.3 41.569,37.831 U14.60@43.036,37.831
  Bottom Layer w0.15: v1(16.967,25.833) 16.967,27.467 19.8,30.3 ; v1(26.2,24.85) 27.8,26.45 27.8,30.3 19.8,30.3 ; v1(31.75,35.65) 31.75,33.65 31.25,33.15 29.65,33.15 29.2,32.7 29.2,31.15 28.35,30.3 19.8,30.3
N16163728: R77.2 U22.38 | length 2.5
  Top Layer w0.15: U22.38@70.832,31.563 70.834,31.562 R77.2@70.834,29.1
N16163728_4947: R51.2 U14.38 | length 2.4
  Top Layer w0.15: U14.38@35.304,31.6 35.304,29.229 R51.2@35.334,29.2
N16195700: D9.1 U1.8 U2.2 | length 51.3
  Top Layer w0.15: U1.8@55.597,52.498 56.648,52.498 58.1,53.95 63.05,53.95 63.7,54.6 63.7,57.15 ; U2.2@56.1,57.77 57.78,57.77 58.45,57.1 63.65,57.1 63.7,57.15 ; D9.1@85.6,69.1 78.8,69.1 76.2,66.5 68.85,66.5 68.55,66.2 64.15,66.2 63.7,65.75 63.7,57.15
N16216551: C14.1 R21.1 R26.2 U1.17 | length 11.9
  Top Layer w0.15: v1(45.434,50.7) R21.1@43.334,50.7 R26.2@45.5,50.7 45.5,51.6 45.75,51.85 49.3,51.85 50.45,53 51.599,53 U1.17@51.601,52.998
  Bottom Layer w0.15: v1(45.434,50.7) C14.1@45.5,50.7
N16273515: H1.1 R103.2 | length 20.5
  Bottom Layer w0.5: H1.1@96.2,3.8 97.934,5.534 R103.2@97.934,23.6
N16273690: H2.1 R100.2 | length 5.4
  Bottom Layer w0.5: H2.1@3.8,3.8 4.067,3.533 R100.2@9.067,3.533
N16273867: H3.1 R101.2 | length 5.8
  Bottom Layer w0.5: H3.1@3.8,76.2 4.233,75.767 R101.2@9.467,75.767
N16274046: H4.1 R102.2 | length 5.6
  Bottom Layer w0.005: H4.1@96.2,76.2 H4.1@96.234,76.166
  Bottom Layer w0.5: R102.2@96.234,70.6 H4.1@96.234,76.166
N157548521: D3.2 R13.2 | length 0
  Top Layer w0.15: v1(37.6,69.1) D3.2@37.607,69.1
  Bottom Layer w0.15: v1(37.6,69.1) R13.2@37.634,69.1
N157561341: D1.2 R11.2 | length 0
  Top Layer w0.15: v1(32.4,69.1) D1.2@32.407,69.1
  Bottom Layer w0.15: v1(32.4,69.1) R11.2@32.434,69.1
N158566590: D10.2 R55.2 | length 0.1
  Top Layer w0.15: D10.2@96.707,13.2 v1(96.75,13.2)
  Bottom Layer w0.15: R55.2@96.7,13.2 v1(96.75,13.2)
N158566590_2577: D12.2 R70.2 | length 0.1
  Top Layer w0.15: D12.2@96.707,19.5 v1(96.75,19.5)
  Bottom Layer w0.15: R70.2@96.734,19.5 v1(96.75,19.5)
N158566591: D10.1 Q1.3 | length 22.6
  Top Layer w0.15: Q1.3@89.107,31.76 90.94,31.76 91.8,30.9 91.8,25.4 93.35,23.85 93.35,13.5 93.65,13.2 D10.1@94.7,13.2
N158566591_2572: D12.1 Q4.3 | length 23.2
  Top Layer w0.15: Q4.3@89.107,39.26 91.04,39.26 92.4,37.9 92.4,25.7 94.7,23.4 D12.1@94.7,19.5
N158572210: D11.2 R56.2 | length 0.1
  Top Layer w0.15: D11.2@96.707,10 v1(96.75,10)
  Bottom Layer w0.15: R56.2@96.7,10 v1(96.75,10)
N158572210_2574: D13.2 R78.2 | length 0.1
  Top Layer w0.15: D13.2@96.707,16.4 v1(96.75,16.4)
  Bottom Layer w0.15: R78.2@96.734,16.4 v1(96.75,16.4)
N158572211: D11.1 Q2.3 | length 22.3
  Top Layer w0.15: Q2.3@89.107,28.06 90.94,28.06 91.5,27.5 91.5,25.2 93.05,23.65 93.05,10.25 93.3,10 D11.1@94.7,10
N158572211_2570: D13.1 Q3.3 | length 22.9
  Top Layer w0.15: Q3.3@89.107,35.46 90.94,35.46 92.1,34.3 92.1,25.55 93.65,24 93.65,16.75 94,16.4 D13.1@94.7,16.4
N159765961: D5.2 R29.2 | length 0
  Top Layer w0.15: v1(74.5,69.1) D5.2@74.507,69.1
  Bottom Layer w0.15: v1(74.5,69.1) R29.2@74.534,69.1
N159775131: D6.2 R30.2 | length 0
  Top Layer w0.15: v1(58.5,69.1) D6.2@58.507,69.1
  Bottom Layer w0.15: v1(58.5,69.1) R30.2@58.534,69.1
N159775491: D7.2 R31.2 | length 0
  Top Layer w0.15: v1(63.5,69.1) D7.2@63.507,69.1
  Bottom Layer w0.15: v1(63.5,69.1) R31.2@63.534,69.1
N159775891: D8.2 R32.2 | length 0
  Top Layer w0.15: v1(48.2,69.1) D8.2@48.207,69.1
  Bottom Layer w0.15: v1(48.2,69.1) R32.2@48.234,69.1
N162067501: D9.2 R33.2 | length 0
  Top Layer w0.15: v1(87.6,69.1) D9.2@87.607,69.1
  Bottom Layer w0.15: v1(87.6,69.1) R33.2@87.634,69.1
PGND: D2.1 D4.1 IC3.2 IC4.2 R8.1 T1.3 U3.2 U3.4 U3.6 U3.8 U7.2 U7.4 U7.6 U7.8 U24.2 U24.4 U24.6 U24.8 U25.3 X3.4 X3.6 X4.2 X4.4 X6.2 X6.4 X9.2 X9.4 X13.7 X13.8 X16.7 X16.8
"PWM OUT": 
"PWM OUT_3967": 
PWR: C15.1 C16.1 C21.1 C26.1 C41.1 C46.1 C47.1 C52.1 L1.2 R21.2 U8.9 U12.9 U17.9 U20.9 X3.1 ~FV1.FV ~FV2.FV ~FV3.FV ~FV4.FV ~FV35.FV ~FV36.FV ~FV37.FV ~FV38.FV ~FV39.FV ~FV40.FV ~FV41.FV ~FV42.FV ~FV43.FV ~FV44.FV ~FV104.FV ~FV105.FV ~FV106.FV ~FV107.FV ~FV108.FV ~FV109.FV ~FV110.FV ~FV111.FV ~FV112.FV ~FV113.FV ~FV114.FV ~FV115.FV ~FV116.FV ~FV117.FV ~FV118.FV ~FV119.FV ~FV120.FV ~FV121.FV ~FV122.FV ~FV123.FV ~FV124.FV ~FV125.FV ~FV126.FV ~FV127.FV ~FV128.FV ~FV129.FV ~FV130.FV | length 4.2
  Top Layer w0.15: v1(67.3,22.75) C46.1@67.3,22.833 ; U20.9@88.249,17.094 88.243,17.1 88.75,17.607 ~FV130.FV@88.75,18.65
  Bottom Layer w0.15: C41.1@67.2,22.8 67.45,22.55 ~FV108.FV@67.45,20.55
SCL: U1.15 X10.3 | length 50.6
  Top Layer w0.15: v1(49.7,54.5) U1.15@52.6,54.496
  Bottom Layer w0.15: X10.3@15.965,74.525 15.965,74.485 18.8,71.65 25.1,71.65 27.8,68.95 27.8,60 31.65,56.15 33.35,56.15 35.5,54 47.6,54 48.1,54.5 v1(49.7,54.5)
SDA: U1.16 X10.2 | length 54.4
  Top Layer w0.15: v1(49.75,53.5) 49.747,53.497 U1.16@51.601,53.497
  Bottom Layer w0.15: X10.2@14.695,77.065 14.7,77.061 14.7,72.85 16.2,71.35 24.95,71.35 27.5,68.8 27.5,59.8 31.45,55.85 33,55.85 35.35,53.5 v1(49.75,53.5)
pads on no net: IC5.1 U8.16 U10.13 U12.16 U13.13 U14.4 U14.5 U14.7 U14.16 U14.17 U14.18 U14.19 U14.20 U14.21 U14.27 U14.28 U14.29 U14.30 U14.35 U14.43 U14.56 U14.66 U14.70 U14.71 U14.79 U14.86 U14.88 U14.97 U14.98 U17.16 U18.13 U20.16 U21.13 U22.4 U22.7 U22.16 U22.17 U22.18 U22.19 U22.20 U22.21 U22.27 U22.28 U22.29 U22.30 U22.35 U22.43 U22.56 U22.66 U22.70 U22.71 U22.79 U22.86 U22.88 U22.97 U22.98 U22.100 X7.6 X10.HOLE
copper on no net: | length 720
  Top Layer w0.25: 0,0 0,80 100,80 100,0 0,0
  Bottom Layer w0.25: 0,0 0,80 100,80 100,0 0,0

## Polygon pours and split planes (outlines as drawn)
PWR on Bottom Layer "1137" (solid, pour order 60): 66.8,18.4 68.7,18.4 68.7,23.7 66.4,23.7 66.4,21.5 66.8,21.5
N15932257 on Bottom Layer "1127" (solid, pour order 60): 1.5,44.8 1.5,42.3 2,42.3 2,39.1 4.2,39.1 4.2,34.7 0.9,34.7 0.9,47 6,47 6,45.3 1.5,45.3
GND on Bottom Layer "1125" (solid, pour order 60): 11.4,49.1 11.4,50.8 15.4,50.8 15.4,49.6 12.5,49.6 12.5,49.1
+3.3V on Bottom Layer "1123" (solid, pour order 60): 11.4,45.9 15.4,45.9 15.4,49.4 12.7,49.4 12.7,48.9 11.4,48.9
N15932011 on Bottom Layer "1121" (solid, pour order 60): 8.8,45.2 11.3,45.2 11.3,50.8 8.8,50.8
N15932053 on Bottom Layer "1119" (solid, pour order 60): 2.2,40 2.2,41.6 9.6,41.6 9.6,45 11.3,45 11.3,39.3 9.9,39.3 9.9,40
N15932045 on Bottom Layer "1117" (solid, pour order 60): 1.7,43.4 1.7,45 9,45 9,43.4
+3.3V on Bottom Layer "1151" (solid, pour order 60): 24.8,0.8 24.8,7.3 92.9,7.3 92.9,22.9 91.7,24.1 89.8,24.1 89.8,27.3 92.4,27.3 95.7,24 95.7,0.7 95.2,0.8
N16100427_4501 on Bottom Layer "1145" (solid, pour order 50): 62.2,1.9 66.6,1.9 66.6,21.3 62.2,21.3
N16100427_4391 on Bottom Layer "1143" (solid, pour order 50): 40.9,1.9 40.9,21.3 45.3,21.3 45.3,1.9
N16100427_4624 on Bottom Layer "1149" (solid, pour order 60): 19.8,2 24.2,2 24.2,21.4 19.8,21.4
N16100427 on Bottom Layer "1147" (solid, pour order 50): 83.1,1.8 87.5,1.8 87.5,21.2 83.1,21.2
PWR on Bottom Layer "1141" (solid, pour order 50): 16.4,30.8 12.1,30.8 12.1,8.6 21.4,8.6 21.4,55.7 24.8,55.7 24.8,70.9 16.4,70.9
PWR on Bottom Layer "1135" (solid, pour order 60): 45.5,18.4 47.4,18.4 47.4,23.7 45.1,23.7 45.1,21.5 45.5,21.5
PWR on Bottom Layer "1133" (solid, pour order 60): 24.4,18.5 26.3,18.5 26.3,23.8 24,23.8 24,21.6 24.4,21.6
PWR on Bottom Layer "1139" (solid, pour order 60): 87.7,18.3 89.6,18.3 89.6,23.6 87.3,23.6 87.3,21.4 87.7,21.4
N16100395_4390 on Top Layer "1163" (solid, pour order 60): 43.4,4.8 43.4,11.9 46.7,11.9 46.7,4.8
N16100395_4623 on Top Layer "1161" (solid, pour order 60): 22.4,4.9 25.7,4.9 25.7,12 22.4,12
N16100395 on Top Layer "1167" (solid, pour order 60): 85.8,4.7 89.1,4.7 89.1,11.8 85.8,11.8
N16100395_4500 on Top Layer "1165" (solid, pour order 60): 64.6,4.7 67.9,4.7 67.9,11.8 64.6,11.8
+1.8V on Top Layer "1115" (solid, pour order 60): 11,38.5 11,45.6 15.3,45.6 15.3,38.5
+3.3V on Top Layer "1113" (solid, pour order 60): 11,45.9 11,52.2 13.5,52.2 13.5,49.5 15.3,49.5 15.3,45.9
N15932099 on Top Layer "1111" (solid, pour order 60): 5.6,43.8 5.6,46.9 7.1,46.9 7.1,49.6 10.8,49.6 10.8,46.3 7.7,46.3 7.7,43.8
N16100427_4501 on Top Layer "1105" (solid, pour order 60): 65.8,16 65.4,16 65.4,19.9 64,19.9 64,22.2 65.8,22.2 65.8,21.5 66.6,21.5 66.6,16
PWR on Top Layer "1103" (solid, pour order 60): 24.5,16 28.5,16 28.5,24.1 23.7,24.1 23.7,21.7 24.5,21.7
PWR on Top Layer "1101" (solid, pour order 60): 45.6,16 49.6,16 49.6,24.1 44.8,24.1 44.8,21.7 45.6,21.7
PWR on Top Layer "1093" (solid, pour order 60): 66.8,16 70.8,16 70.8,24.1 66,24.1 66,21.7 66.8,21.7
N16100427_4624 on Top Layer "1109" (solid, pour order 60): 23.5,16 24.3,16 24.3,21.5 23.5,21.5 23.5,22.2 21.7,22.2 21.7,19.9 23.1,19.9 23.1,16
GND on Top Layer "1095" (solid, pour order 60): 61.8,12.2 61.8,15.8 70.8,15.8 70.8,12.2
N16100427_4391 on Top Layer "1107" (solid, pour order 60): 44.6,16 44.2,16 44.2,19.9 42.8,19.9 42.8,22.2 44.6,22.2 44.6,21.5 45.4,21.5 45.4,16
GND on Top Layer "1099" (solid, pour order 60): 19.5,12.2 19.5,15.8 28.5,15.8 28.5,12.2
GND on Top Layer "1097" (solid, pour order 60): 40.6,12.2 40.6,15.8 49.6,15.8 49.6,12.2
N16082815 on Top Layer "1071" (solid, pour order 60): 6.6,53.7 6.6,57.6 13.9,57.6 13.9,53.7
N16083562 on Top Layer "1069" (solid, pour order 60): 6.7,63.1 6.7,67.2 13.9,67.2 13.9,63.1
+12V on Top Layer "1061" (solid, pour order 60): 20.9,62.8 20.9,72.3 23.5,72.3 23.5,62.8
N16083671 on Top Layer "1059" (solid, pour order 60): 20.5,62.8 14.2,62.8 14.2,72.3 20.5,72.3
GND on Top Layer "1057" (solid, pour order 55): 13.9,57.8 13.9,62.8 6.4,62.8 6.4,67.4 13.9,67.4 13.9,72.3 8,72.3 4.3,68.6 4.3,47.2 6.9,47.2 6.9,49.8 10.8,49.8 10.8,52.5 13.8,52.5 13.8,49.8 16.2,49.8 16.2,53.5 6.4,53.5 6.4,57.8
N15685693 on Top Layer "1067" (solid, pour order 60): 14.2,53.8 14.2,62.5 20.5,62.5 20.5,53.8
+5V on Top Layer "1065" (solid, pour order 60): 8.4,72.5 14.8,72.5 14.8,75.8 0.9,75.8 0.9,33.9 10.5,33.9 10.5,42 2.7,42 2.7,45 4.1,45 4.1,43.9 4.8,43.9 4.8,45.9 4,45.9 4,67.5 6,70.6 7.9,72.5
+12V on Top Layer "1053" (solid, pour order 60): 28.2,51.8 28.2,56.1 48.7,56.1 48.7,51.8
PGND on Top Layer "1051" (solid, pour order 60): 74.4,54.2 92.7,54.2 92.7,25.1 98.8,25.1 98.8,77.9 23.8,77.9 23.8,78.5 19.7,78.5 19.7,75.8 23.8,75.8 23.8,56.5 48.7,56.5 48.7,71.2 67.8,71.2 67.8,66.4 64,66.4 64,54.2
N16100427 on Top Layer "1085" (solid, pour order 60): 87.2,15.8 88,15.8 88,21.3 87.2,21.3 87.2,22 85.4,22 85.4,19.7 86.8,19.7 86.8,15.8
PWR on Top Layer "1083" (solid, pour order 60): 88.2,15.8 92.2,15.8 92.2,23.9 87.4,23.9 87.4,21.5 88.2,21.5
GND on Top Layer "1081" (solid, pour order 60): 83.2,12.2 83.2,15.8 92.2,15.8 92.2,12.2
GND on Top Layer "1173" (solid, pour order 40): 1.9,41.9 7.7,41.9 7.7,43.8 5.3,43.8 5.3,45.9 4.7,45.9 4.7,43.8 1.9,43.8
PWR on Top Layer "1087" (solid, pour order 60): 20.9,50.4 40.4,50.4 40.4,50 42.1,50 42.1,51.5 27.9,51.5 27.9,56.1 23.5,56.1 23.5,62.5 20.9,62.5
GND on Top Layer "1079" (solid, pour order 60): 19.5,72.5 23.5,72.5 23.5,75.5 19.4,75.5 19.4,78.5 15.8,78.5 15.8,72.5
PWR on Mid-Layer 2 "1131" (solid, pour order 60): 9.6,1.8 92.1,1.8 92.1,17.4 89.6,17.4 89.6,20.9 88,20.9 88,17.4 69.1,17.4 69.1,21.2 66.8,21.2 66.8,17.4 47.9,17.4 47.9,21.4 45.6,21.4 45.6,17.4 26.4,17.4 26.4,21.3 24.7,21.3 24.7,17.4 9.6,17.4
+5V on Mid-Layer 2 "1091" (solid, pour order 40): 12.1,59.3 12.1,75.7 14.6,75.7 14.6,51.7 15.2,51.1 43.4,51.1 43.4,53.4 48,58 50.4,58 50.4,56.2 47.9,56.2 44.7,53 44.7,50.2 12.1,50.2
+5V on Mid-Layer 2 "1075" (solid, pour order 40): 91.9,69.9 91.9,2 88.3,2 88.3,4.8 85.8,4.8 85.8,2 75.4,2 75.4,8.3 77,8.3 77,14.4 72.1,14.4 72.1,2 67.3,2 67.3,4.7 64.6,4.7 64.6,2 53.7,2 53.7,7.7 56,7.7 56,14.5 50.7,14.5 50.7,2 46.2,2 46.2,4.7 43.5,4.7 43.5,2 32.2,2 32.2,7.9 34.8,7.9 34.8,14.4 29.6,14.4 29.6,2 25,2 25,4.7 22.4,4.7 22.4,2 10.4,2 10.4,11.1 13.6,11.1 13.6,15 10.4,15 10.4,38.7 1.4,38.7 1.4,34.1 7.5,34.1 7.5,0.7 99.2,0.7 99.2,70.9 91.9,70.9
+1.8V on Mid-Layer 2 "1073" (solid, pour order 10): 65.9,41.3 63.7,39.1 59.3,39.1 56.2,36 39.4,36 37.9,34.5 37.9,32.9 38.5,32.3 38.5,28.3 36,28.3 36,35.9 37.4,35.9 37.9,36.4 38.4,36.4 39.4,37.4 39.4,37.9 40.1,38.6 41.4,38.6 41.8,39 41.8,44.6 38.6,47.8 38.6,48.7 38.4,48.9 37.6,48.9 37.4,48.7 37.4,47.6 30.3,47.6 29,46.3 29,41.1 28.5,40.6 26.4,40.6 26.4,38.7 25.5,37.8 20.6,37.8 16,42.4 12.6,42.4 12.6,45.7 15.7,45.7 19.3,42.1 27,42.1 27.7,42.8 27.7,49.8 40.1,49.8 41.2,48.7 41.2,47.7 43.1,45.8 43.1,41.9 44.5,40.5 48.2,40.5 50.6,42.9 65.9,42.9 65.9,46.3 82.1,46.3 82.1,33.4 79.1,33.4 77.6,34.7 74.8,34.7 74.2,34.1 74.2,33 73.4,32.2 72,32.2 72,35.2 72.6,35.8 72.6,37.8 73.2,38.4 75.6,38.4 76.4,39.2 79.6,39.2 79.6,40.1 80.8,40.1 80.8,41.3
+12V on Mid-Layer 2 "1055" (solid, pour order 45): 21.4,52 50.1,52 50.1,71.8 92.5,71.8 92.5,78.2 21.4,78.2
+3.3V on Mid-Layer 2 "1047" (solid, pour order 60): 0.8,17.7 0.8,79.1 99.2,79.1 99.2,17.7 89.9,17.7 89.9,21.1 87.7,21.1 87.7,17.7 69.3,17.7 69.3,21.5 66.5,21.5 66.5,17.7 48.1,17.7 48.1,21.6 45.4,21.6 45.4,17.6 26.6,17.6 26.6,21.5 24.5,21.5 24.5,17.7
PWR on Mid-Layer 2 "1089" (solid, pour order 40): 20.7,56.5 26.7,56.5 26.7,76.3 23.9,76.3 23.9,62.9 20.7,62.9
AGND on Mid-Layer 1 "1129" (solid, pour order 0): 23.9,31.4 31,31.4 31,25.5 30.3,24.8 30.3,21.1 28.5,19.3 28.5,12.8 27.9,12.2 24.1,12.2 24.1,9 25.8,7.3 25.8,1.3 92.2,1.3 92.2,10.5 88.4,10.5 88.4,4.1 70.3,4.1 70.3,10.6 67.5,10.6 67.5,4.1 49.3,4.1 49.3,10.6 46.3,10.6 46.3,4.1 33.4,4.1 33.4,12.4 29.7,12.4 29.7,14.7 30.5,15.5 32.8,15.5 32.8,28 36.3,28 36.3,34.7 38.6,34.7 39.9,36 41.6,36 48,29.6 54.5,29.6 57.5,32.6 61.2,32.6 63.7,35.1 67.5,35.1 67.5,30.8 74.3,30.8 74.3,34.7 71.6,34.7 71.6,39.2 62.3,39.2 62.3,36.5 58,36.5 54.9,33.4 49.9,33.4 45.2,38.1 37.6,38.1 36.4,39.3 21.5,39.3 21.5,36.3 23.9,36.3
GND on Mid-Layer 1 "1049" (solid, pour order 60): 0.7,1 0.7,79.2 99.2,79.2 99.2,1

## Keep-outs
Keep-Out Layer:
  lines w0.25: 0,0 100,0 100,80 0,80 0,0

## Other copper
Bottom Layer:
  text "HEIG-VD/CRH/2009/02/YCR/PGR/v1.0" at 48.7,51.9 h0.75
  text "GRIPPER BOARD" at 44,50.7 h0.75

## Silkscreen, mask and mechanical layers (free items; w line width, h text height)
Top Overlay:
  lines w0.15: 28.9,33 41.7,33 41.7,45.8 28.9,45.8 28.9,33 ; 64.5,32.9 77.3,32.9 77.3,45.7 64.5,45.7 64.5,32.9
  lines w0.25: 0,0 0,80 100,80 100,0 0,0
Bottom Overlay:
  lines w0.25: 0,0 0,80 100,80 100,0 0,0
Bottom Solder:
  text "HEIG-VD/CRH/2009/02/YCR/PGR/v1.0" at 48.7,51.9 h0.75
  text "GRIPPER BOARD" at 44,50.7 h0.75
Mechanical 16:
  lines w0.254: -7.897,0 -2.182,0 ; -7.897,80 -2.182,80 ; -5.516,1.429 -5.039,0 ; -5.516,78.571 -5.039,80 ; -5.039,34.708 -5.039,0 ; -5.039,45.292 -5.039,80 ; -4.563,1.429 -5.039,0 ; -4.563,78.571 -5.039,80 ; 0,83.461 0,89.176 ; 1.429,85.842 0,86.318 ; 1.429,86.795 0,86.318 ; 44.19,86.318 0,86.318 ; 55.81,86.318 100,86.318 ; 98.571,85.842 100,86.318 ; 98.571,86.795 100,86.318 ; 100,83.461 100,89.176
  text "100.000" at 45.619,85.048 h1.43
  text "80.000" at -3.769,36.137 h1.43 r90
Drill Drawing:
  lines w0.254: -0.127,-45.847 94.742,-45.847 ; -0.127,-45.72 -0.127,0 ; -0.127,0.127 94.742,0.127 ; 0,-40.64 94.615,-40.64 ; 0,-36.83 94.615,-36.83 ; 0,-33.02 94.615,-33.02 ; 0,-29.21 94.615,-29.21 ; 0,-25.4 94.615,-25.4 ; 0,-21.59 94.615,-21.59 ; 0,-17.78 94.615,-17.78 ; 0,-13.97 94.615,-13.97 ; 0,-10.16 94.615,-10.16 ; 0,-10.033 94.615,-10.033 ; 0,-5.08 94.615,-5.08 ; 0,-4.953 94.615,-4.953 ; 4,-31.115 5.271,-31.115 ; 4,-19.685 5.271,-19.685 ; 4,-16.51 5.271,-15.24 ; 4,-15.24 5.271,-16.51 ; 4.635,-31.75 4.635,-30.48 ; 4.635,-20.32 4.635,-19.05 ; 9.271,-40.64 9.271,-5.08 ; 9.398,-40.64 9.398,-5.08 ; 30.713,-40.64 30.713,-5.08 ; 51.202,-45.72 51.202,-5.08 ; 65.299,-45.72 65.299,-5.08 ; 94.742,-45.72 94.742,0 ; 4,-27.94 4,-26.67 ; 4,-27.94 5.271,-27.94 ; 4,-27.94 5.271,-26.67 ; 4,-26.67 5.271,-26.67 ; 4,-26.67 5.271,-27.94 ; 5.271,-27.94 5.271,-26.67 ; 0,-45.72 94.615,-45.72 94.615,0 0,0 0,-45.72 ; 4,-38.989 4,-38.481 4.381,-38.1 4.889,-38.1 5.271,-38.481 5.271,-38.989 4.889,-39.37 4.381,-39.37 4,-38.989 ; 4,-34.925 4,-34.29 4.635,-34.29 4.635,-35.56 5.271,-35.56 5.271,-34.925 4,-34.925 ; 4,-31.75 4,-30.48 5.271,-30.48 5.271,-31.75 4,-31.75 ; 4,-23.495 4.635,-22.86 5.271,-23.495 4.635,-24.13 4,-23.495 ; 4,-12.319 4.635,-11.684 5.271,-12.319 4,-12.319
  text ".Legend" at 0,0 h1.52